# Altium PCB PCB_all_try.PcbDoc (part 5 of 5)
Units mm, origin at the board's own origin, x right, y up, seen from the top; angles counter-clockwise.
Board outline 345 x 240 mm, 2 copper layers (Top Layer, Bottom Layer); 484 components, 419 nets, 1569 pads, 699 vias.
Unrouted connection lines stored in the file: 63.
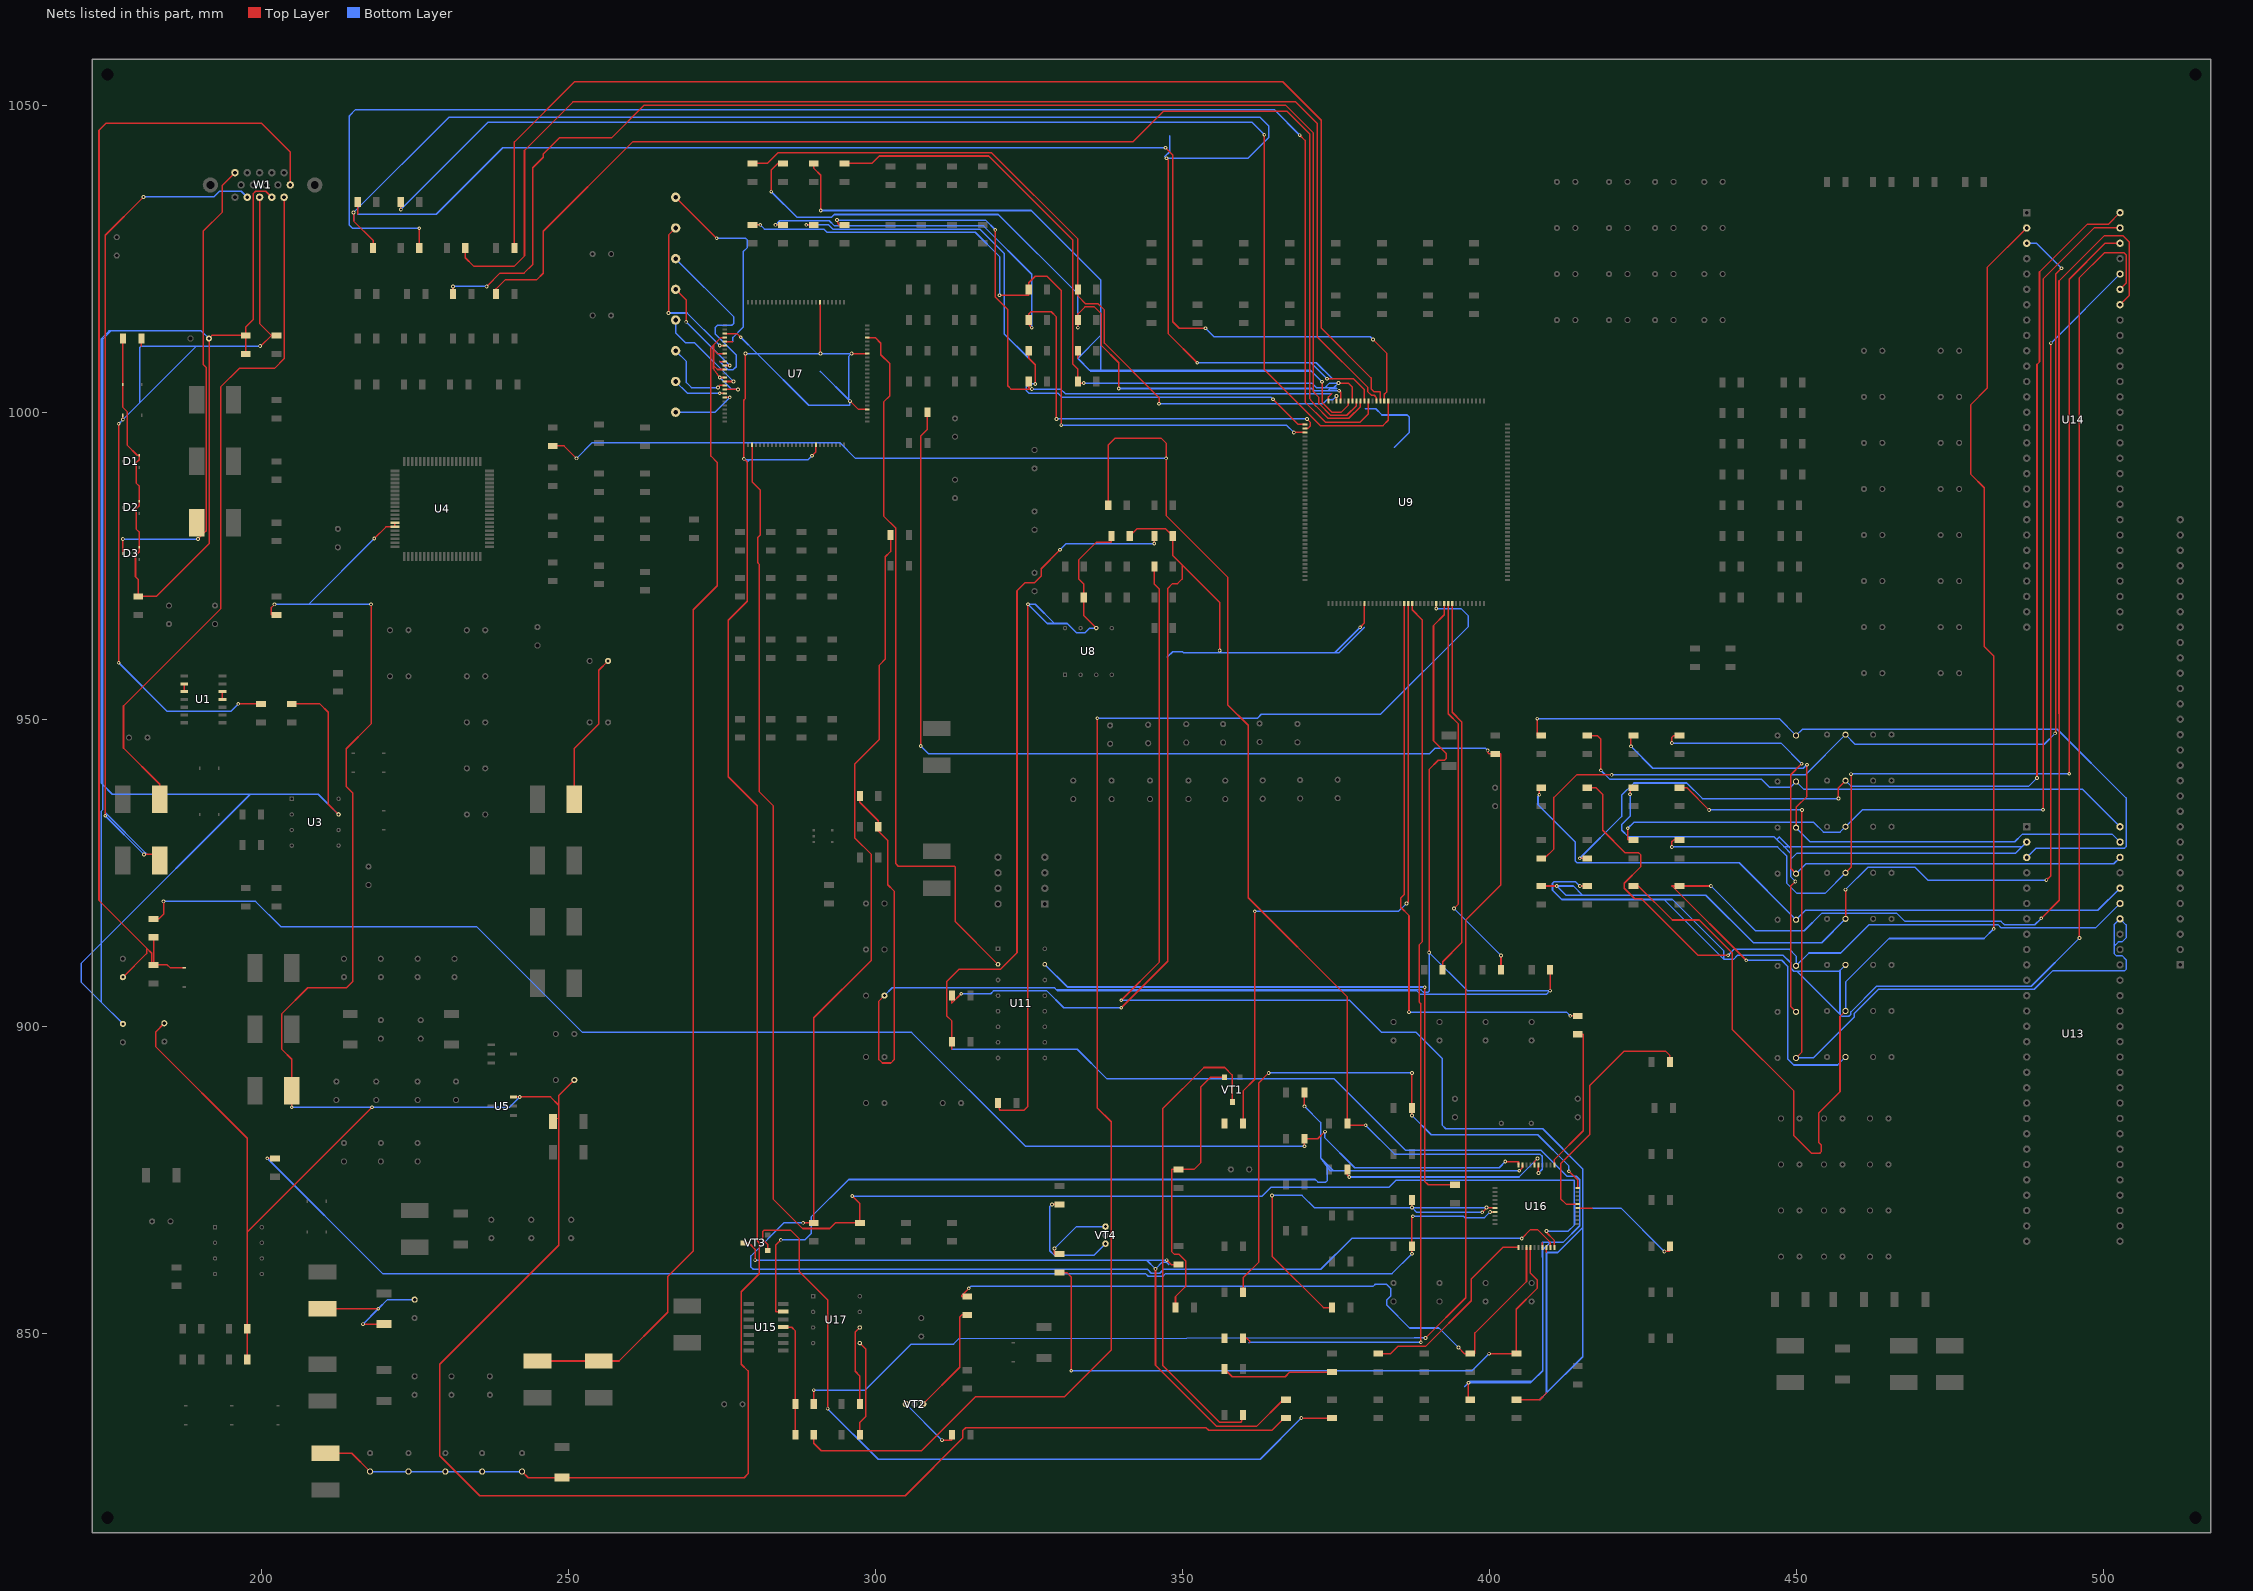
[diagram p5: the nets of this part, all layers, seen from the top]

## Via types
v1: diameter 0.6, hole 0.3, Top Layer to Bottom Layer, 699 vias

## Nets (pads, with @x,y where several pads share a name; then routed paths per layer and width w, separated by ;. In a path a pad name is that pad's centre, name@x,y a point inside that pad or via, vN(x,y) a via of type N, cw(c..) or ccw(c..) an arc to the next point about the centre after c; other vN are vias at no path point) (continued)
NetR186_2: R186.2 R200.2 U16.16 | length 74.6
  Top Layer w0.25: v1(364.617,872.465) 364.617,862.559 372.976,854.2 R186.2@374.4,854.2 ; v1(387.4,870.483) R200.2@387.4,871.7 ; v1(398.856,869.699) v1@399.59,870.433 ; v1(399.539,870.483) v1@399.59,870.433 ; v1@399.59,870.433 U16.16@400.754,870.433 ; U16.16@400.754,870.433 400.787,870.433 U16.16@400.95,870.4 U16.16@400.754,870.433
  Bottom Layer w0.25: v1(364.617,872.465) 369.494,872.465 371.475,870.483 v1(387.4,870.483) ; v1(398.856,869.699) 388.185,869.699 v1(387.4,870.483) ; v1(399.539,870.483) v1(387.4,870.483)
NetR188_1: R188.1 U15.13 U16.9 | length 160
  Top Layer w0.25: v1(284.632,865.226) 283.82,864.413 283.82,853.54 U15.13@285,853.54 ; v1(369.9,886.968) R188.1@369.9,889.2 ; v1(404.876,876.478) 405.4,877.002 U16.9@405.4,877.45
  Bottom Layer w0.25: v1(284.632,865.226) 288.544,865.226 289.56,866.242 289.56,868.934 295.681,875.055 371.666,875.055 372.091,874.63 373.38,874.63 373.634,874.884 373.634,877.088 ; v1(369.9,886.968) 372.52,884.348 372.52,878.585 ; v1(404.876,876.478) 374.628,876.478 ; 372.52,878.585 373.634,877.472 ; 372.52,878.585 373.634,877.088 ; 373.634,877.088 373.634,877.472 ; 373.634,877.088 374.087,876.478 374.628,876.478 ; 373.634,877.472 374.628,876.478
NetR189_1: R189.1 R204.2 | length 18.3
  Top Layer w0.25: R189.1@356.9,844.2 358.15,842.95 366.751,842.95 367.501,843.7 R204.2@374.4,843.7
NetR190_1: R190.1
NetR191_1: R191.1
NetR192_1: R192.1 U16.1 | length 24.1
  Top Layer w0.25: U16.1@410.6,877.45 410.6,878.307 415.29,882.997 415.29,898.7 R192.1@414.4,898.7
NetR196_1: R196.1 R197.1 U15.11 | length 19.1
  Top Layer w0.25: U15.11@285,851 286.392,851 287,850.392 R197.1@287,838.5 R196.1@287,833.5
NetR202_1: R202.1 U16.6 | length 34.5
  Top Layer w0.25: R202.1@376.9,876.7 376.9,875.752 v1(377.19,875.462) ; U16.6@407.35,877.45 407.35,877.97 v1(407.858,878.478)
  Bottom Layer w0.25: v1(377.19,875.462) 404.842,875.462 v1(407.858,878.478)
NetR207_2: R207.2 R208.1 U16.40 | length 100.9
  Top Layer w0.25: R207.2@359.9,856.7 359.9,859.053 362.483,861.637 362.483,890.829 v1(364.058,892.404) ; v1(387.4,885.469) R208.1@387.4,886.7 v1(387.4,892.404) ; v1(412.953,876.402) 414.4,874.955 U16.40@414.4,873.65
  Bottom Layer w0.25: v1(364.058,892.404) v1(387.4,892.404) ; v1(387.4,885.469) 390.524,882.345 407.866,882.345 412.953,877.258 v1(412.953,876.402)
NetR209_2: R209.2 VT1.3 | length 78.6
  Top Layer w0.25: VT1.3@358.15,887.7 358.15,888.071 358.104,892.094 356.905,893.293 353.517,893.293 346.786,886.562 346.786,844.804 356.032,835.558 359.621,835.558 R209.2@359.9,836.7
NetR214_2: R214.2 R231.1 U16.23 | length 113.4
  Top Layer w0.25: R231.1@315,856 314.08,856 314.08,856.172 v1(315.234,857.326) ; v1(394.97,847.7) 395.97,846.7 R214.2@396.9,846.7 397.662,846.7 397.662,850.062 406.05,858.449 U16.23@406.05,864
  Bottom Layer w0.25: v1(315.234,857.326) 315.615,857.707 381.127,857.707 381.432,858.012 383.261,858.012 383.946,857.326 383.946,856.082 383.286,855.421 383.286,854.608 387.02,850.875 391.795,850.875 v1(394.97,847.7)
NetR216_2: R216.2 R232.1 U16.24 | length 110.3
  Top Layer w0.25: R232.1@330,859.9 331.216,859.9 331.927,859.189 v1(331.927,843.915) ; v1(399.965,846.7) R216.2@404.393,846.7 ; R216.2@404.4,846.7 R216.2@404.393,846.7 ; U16.24@406.7,864 406.7,859.795 407.779,858.716 407.779,857.326 404.393,853.941 R216.2@404.393,846.7
  Bottom Layer w0.25: v1(331.927,843.915) 397.18,843.915 v1(399.965,846.7)
NetR218_2: R218.2 R226.1 VT1.2 | length 46.6
  Top Layer w0.25: R226.1@348.9,854.2 348.9,855.986 350.545,857.631 350.545,861.822 349.504,862.863 348.742,862.863 348.259,863.346 348.259,876.7 R218.2@349.4,876.7 351.911,876.7 353.035,877.824 353.035,890.151 354.584,891.7 VT1.2@356.9,891.7
NetR231_2: R231.2 VT2.1 | length 18
  Top Layer w0.25: VT2.1@307.8,838.5 313.773,844.473 313.773,852.678 314.095,853 R231.2@315,853
NetR232_2: R232.2 VT4.1 | length 11.5
  Top Layer w0.25: v1(329.184,863.814) 329.184,862.9 R232.2@330,862.9
  Bottom Layer w0.25: v1(329.184,863.814) 332.77,867.4 VT4.1@337.5,867.4
NetR233_2: R233.2 VT3.1 | length 128
  Top Layer w0.25: VT3.1@282.5,863.5 282.5,864.489 281.686,865.303 281.686,866.572 281.94,866.826 286.207,866.826 287.604,865.429 287.604,860.12 292.252,855.472 v1(292.252,837.743) ; v1(369.392,836.219) 369.411,836.2 R233.2@374.4,836.2
  Bottom Layer w0.25: v1(292.252,837.743) 300.482,829.513 362.687,829.513 v1(369.392,836.219)
NetR234_2: R234.2 U17.6 | length 13.1
  Top Layer w0.25: R234.2@297.5,838.5 297.5,843.077 296.748,843.829 296.748,850.208 U17.6@297.5,850.96
NetR235_2: R235.2 U17.5 | length 15.7
  Top Layer w0.25: R235.2@297.5,833.5 297.5,835.508 298.45,836.458 298.45,847.47 U17.5@297.5,848.42
NetR236_1: R236.1 R237.1 VT3.3 | length 121
  Top Layer w0.25: VT3.3@278.5,864.75 279.4,864.75 280.441,863.709 v1(280.441,861.924) ; v1(345.643,860.501) 345.643,844.804 355.6,834.847 362.093,834.847 366.446,839.2 R237.1@366.9,839.2 ; v1(347.472,861.924) 348.196,861.2 R236.1@349.4,861.2
  Bottom Layer w0.25: v1(280.441,861.924) 344.221,861.924 ; v1(347.472,861.924) 344.221,861.924 ; 347.789,861.2 347.421,861.568 346.71,861.568 v1(345.643,860.501) 344.221,861.924
NetR238_1: R238.1 VT4.3 | length 19.1
  Top Layer w0.25: v1(328.778,871) R238.1@330,871
  Bottom Layer w0.25: v1(328.778,871) 328.422,870.644 328.422,863.448 329.184,862.686 335.586,862.686 VT4.3@337.5,864.6
NetR239_1: R239.1 VT2.3 | length 10.8
  Top Layer w0.25: v1(310.888,832.612) 312.5,832.612 R239.1@312.5,833.5
  Bottom Layer w0.25: VT2.3@305,838.5 v1(310.888,832.612)
NetRX_CLK+_1: RX_CLK+.1 U7.93 | length 8.8
  Top Layer w0.25: v1(274.676,1003.071) 274.697,1003.05 U7.93@275.5,1003.05
  Bottom Layer w0.25: RX_CLK+.1@267.5,1005 269.429,1003.071 v1(274.676,1003.071)
NetRX_CLK_1: RX_CLK.1 U7.94 | length 10.7
  Top Layer w0.25: U7.94@275.5,1002.4 276.316,1002.4 v1(276.327,1002.411)
  Bottom Layer w0.25: RX_CLK.1@267.5,1000 273.916,1000 v1(276.327,1002.411)
NetRX_D0+_1: RX_D0+.1 U7.90 | length 16.2
  Top Layer w0.25: U7.90@275.5,1005 v1(276.911,1005)
  Bottom Layer w0.25: RX_D0+.1@267.5,1015 267.5,1012.952 269.127,1011.325 270.586,1011.325 v1(276.911,1005)
NetRX_D0-_1: RX_D0-.1 U7.91 | length 12.6
  Top Layer w0.25: v1(274.388,1004.011) 274.726,1004.35 U7.91@275.5,1004.35
  Bottom Layer w0.25: RX_D0-.1@267.5,1010 269.265,1008.235 269.265,1004.824 270.078,1004.011 v1(274.388,1004.011)
NetRX_D1+_1: RX_D1+.1 U7.85 | length 29.8
  Top Layer w0.25: 274.679,1008.25 U7.85@275.5,1008.25
  Bottom Layer w0.25: RX_D1+.1@267.5,1025 276.987,1015.513 276.987,1014.476 276.657,1014.146 274.32,1014.146 273.99,1013.816 273.99,1012.673 277.368,1009.294 277.368,1007.415 276.86,1006.907 276.022,1006.907 274.676,1008.253
NetRX_D1-_1: RX_D1-.1 U7.86 | length 16.9
  Top Layer w0.25: RX_D1-.1@267.5,1020 269.215,1018.285 v1(269.215,1014.705) ; U7.86@275.5,1007.6 276.319,1007.6 v1(276.327,1007.593)
  Bottom Layer w0.25: v1(269.215,1014.705) v1(276.327,1007.593)
NetRX_D2+_1: RX_D2+.1 U7.80 | length 33.4
  Top Layer w0.25: RX_D2+.1@267.5,1035 v1(274.174,1028.326) ; U7.80@275.5,1011.5 276.83,1011.5
  Bottom Layer w0.25: v1(274.174,1028.326) 278.892,1028.326 279.19,1028.028 279.19,1026.821 278.486,1026.117 278.486,1013.834 276.835,1012.183 276.835,1011.504 276.83,1011.5
NetRX_D2-_1: RX_D2-.1 U7.81 | length 25.7
  Top Layer w0.25: v1(266.344,1016.152) 266.344,1028.844 RX_D2-.1@267.5,1030 ; v1(274.676,1010.85) U7.81@275.5,1010.85
  Bottom Layer w0.25: v1(266.344,1016.152) 269.373,1016.152 v1(274.676,1010.85)
NetU1_2: U1.2 U1.3 | length 1.3
  Top Layer w0.25: U1.3@187.5,954.5 U1.2@187.5,955.77
NetU1_11: U1.11 U1.12 | length 1.3
  Top Layer w0.25: U1.11@193.7,953.23 U1.12@193.7,954.5
O3_3V: C43.1 C46.2 C48.2 C51.2 C53.2 C54.2 L14.2 U7.18 U7.29 U7.43 U7.57 U7.78 | length 345
  Top Layer w0.25: L14.2@210.5,830.5 214.75,830.5 C54.2@217.75,827.5 ; C46.2@242.5,827.5 243.5,826.5 C43.1@249,826.5 278.673,826.5 279.298,827.126 279.298,843.89 278.206,844.982 278.206,856.793 281.127,859.714 281.127,864.743 280.797,865.073 280.797,935.914 276.073,940.638 276.073,966.14 279.146,969.213 279.146,991.87 v1(278.613,992.403) 278.613,1001.954 278.867,1002.208 v1(278.867,1009.55) ; U7.78@275.5,1012.8 277.501,1012.8 v1(278.111,1012.19) ; v1(289.718,992.914) 290.35,993.546 U7.18@290.35,994.7 ; U7.57@291,1017.9 291,1017.473 291.084,1017.389 v1(291.084,1009.55) ; v1(295.91,1001.801) 297.261,1000.45 U7.29@298.7,1000.45 ; v1(296.164,1009.55) U7.43@298.7,1009.55
  Bottom Layer w0.25: C54.2@217.75,827.5 C53.2@224,827.5 C51.2@230,827.5 C48.2@236,827.5 C46.2@242.5,827.5 ; v1(278.111,1012.19) 280.751,1009.55 ; v1(278.613,992.403) 278.792,992.224 279.5,992.224 ; v1(278.867,1009.55) 280.751,1009.55 ; 279.146,991.87 279.5,992.224 ; v1(289.718,992.914) 289.028,992.224 279.5,992.224 ; 291.084,1006.627 v1@295.841,1001.87 ; v1(295.91,1001.801) v1@295.841,1001.87 ; 280.751,1009.55 v1(291.084,1009.55) v1(296.164,1009.55) 295.663,1009.049 295.663,1002.152 ; 280.751,1009.55 289.16,1001.141 295.841,1001.141 v1@295.841,1001.87 ; 295.663,1002.152 v1@295.841,1001.974 ; 295.663,1002.152 v1@295.841,1001.974 ; v1@295.841,1001.87 v1@295.841,1001.974
OSD_B: R190.2 U9.22 | length 150.8
  Top Layer w0.25: R190.2@359.9,849.2 359.9,849.224 360.502,849.224 360.959,848.766 360.959,848.563 ; U9.22@387.45,968.85 387.45,967.818 389.047,966.221 389.047,913.739 388.569,913.261 388.569,903.961 388.849,903.681 v1(388.849,848.563)
  Bottom Layer w0.25: 360.858,848.462 360.959,848.563 v1(388.849,848.563)
OSD_CLK: C131.1 R175.2 R176.2 R193.2 U9.30 | length 321.6
  Top Layer w0.25: R175.2@297.5,937.5 297.5,936.475 300.5,933.475 R176.2@300.5,932.5 300.5,931.799 302.057,930.242 302.057,923.036 303.073,922.02 303.073,894.537 302.565,894.029 301.168,894.029 300.609,894.588 300.609,904.109 C131.1@301.5,905 ; v1(390.195,912.012) 390.195,941.832 391.693,943.331 392.709,943.331 392.989,943.61 392.989,944.423 390.906,946.506 390.906,965.259 392.65,967.003 U9.30@392.65,968.85 ; v1(409.9,905.815) R193.2@409.9,909.2
  Bottom Layer w0.25: C131.1@301.5,905 302.763,906.263 329.201,906.263 329.529,905.935 ; 329.529,905.935 329.649,905.815 388.151,905.815 388.779,905.187 409.272,905.187 v1(409.9,905.815) 396.392,905.815 v1(390.195,912.012) 390.195,905.745 389.959,905.51 389.313,905.51 388.888,905.935 329.529,905.935
OSD_G: R191.2 U9.21 | length 109.5
  Top Layer w0.25: R191.2@359.9,884.2 359.9,889.465 361.798,891.362 v1(361.798,918.718) ; v1(386.512,920.013) 386.8,920.302 U9.21@386.8,968.85
  Bottom Layer w0.25: v1(361.798,918.718) 385.216,918.718 v1(386.512,920.013)
OSD_HS: R194.2 U9.31 | length 63.8
  Top Layer w0.25: U9.31@393.3,968.85 393.3,950.893 394.975,949.218 394.975,919.938 v1(394.233,919.196) ; R194.2@401.9,909.2 v1(401.9,911.53)
  Bottom Layer w0.25: v1(394.233,919.196) v1(401.9,911.53)
OSD_R: R192.2 U9.20 | length 95.1
  Top Layer w0.25: U9.20@386.15,968.85 386.15,921.48 385.572,920.902 385.572,919.378 386.918,918.032 v1(386.918,902.31) ; v1(413.182,901.7) R192.2@414.4,901.7
  Bottom Layer w0.25: v1(386.918,902.31) 412.572,902.31 v1(413.182,901.7)
OSD_VS: R195.2 U9.32 | length 61.6
  Top Layer w0.25: R195.2@392.4,909.2 392.4,910.514 395.479,913.593 395.479,949.603 393.95,951.132 U9.32@393.95,968.85
P3_3V: C41.1 C44.2 L15.2 | length 22.6
  Top Layer w0.25: L15.2@210,854 v1(219.086,854) ; v1(216.586,851.5) C41.1@220,851.5
  Bottom Layer w0.25: v1(216.586,851.5) v1(219.086,854) 220.586,855.5 C44.2@225,855.5
P3V3: C16.2 C38.1 C40.1 L12.1 R22.1 R52.1 R53.1 R237.2 U4.34 U4.35 U5.3 | length 486.2
  Top Layer w0.25: C16.2@184.25,900.5 182.88,899.13 182.88,896.641 197.75,881.771 197.75,866.51 ; R53.1@197.75,845.75 R52.1@197.75,850.75 197.75,866.51 ; v1(202.184,968.705) 201.676,968.197 201.676,967 R22.1@202.5,967 ; v1(205,886.823) L12.1@205,889.5 205,894.642 203.403,896.239 203.403,902.081 207.594,906.272 213.893,906.272 214.909,907.288 214.909,937.994 213.872,939.032 213.872,945.214 217.907,949.249 v1(217.907,968.705) ; v1(218.063,886.823) 197.75,866.51 ; v1(218.44,979.424) 220.341,981.325 U4.35@221.778,981.325 U4.34@221.778,981.975 ; U5.3@241.1,888.5 v1(242.127,888.5) 247.136,888.5 248.488,887.148 ; C40.1@247.5,884.5 247.5,885.19 247.666,885.147 248.488,884.936 ; C38.1@251,891.25 248.488,888.738 248.488,887.148 ; R237.2@366.9,836.2 366.598,836.2 364.61,834.212 354.305,834.212 353.873,834.644 314.731,834.644 314.223,834.136 314.223,832.917 304.876,823.57 235.61,823.57 229.108,830.072 229.108,844.956 248.488,864.337 248.488,884.936 ; 248.488,884.936 248.488,887.148
  Bottom Layer w0.25: v1(202.184,968.705) 207.721,968.705 ; v1(205,886.823) v1(218.063,886.823) 240.45,886.823 v1(242.127,888.5) ; v1(217.907,968.705) 207.721,968.705 ; v1(218.44,979.424) 207.721,968.705
PD: R228.2 U7.2 U16.30 | length 280.1
  Top Layer w0.25: U7.2@279.95,994.7 279.95,988.67 281.28,987.34 281.28,980.008 280.867,979.596 280.867,975.487 281.083,975.271 281.083,938.218 283.362,935.939 283.362,871.888 288.17,867.08 292.608,867.08 293.528,868 R228.2@297.5,868 297.51,868 297.51,871.118 v1(296.266,872.363) ; v1(409.312,866.664) 409.194,866.546 410.6,865.14 U16.30@410.6,864
  Bottom Layer w0.25: v1(296.266,872.363) 363.007,872.363 364.429,873.785 383.642,873.785 384.759,874.903 413.842,874.903 413.868,867.664 412.868,866.664 v1(409.312,866.664)
PDO: R57.2 R227.2 U16.29 | length 268.9
  Top Layer w0.25: v1(288.265,868) R227.2@290,868 290,901.378 299.39,910.768 299.39,927.964 296.672,930.681 296.672,942.721 300.685,946.734 300.685,958.825 301.65,959.79 301.65,976.452 302.5,977.302 R57.2@302.5,980 ; v1(405.268,865.454) 406.715,866.902 407.832,866.902 409.95,864.784 U16.29@409.95,864
  Bottom Layer w0.25: v1(288.265,868) 285.146,868 279.756,862.609 279.756,860.806 280.137,860.425 344.344,860.425 344.962,859.808 346.32,859.808 346.937,860.425 372.567,860.425 377.596,865.454 v1(405.268,865.454)
PKA_GND: L16.2 L17.2 U7.79 U7.83 U7.87 U7.89 U7.92 | length 204.9
  Top Layer w0.25: L16.2@245,845.5 L17.2@255,845.5 258.293,845.5 266.217,853.425 266.217,859.257 270.383,863.422 270.383,967.842 274.295,971.753 274.295,991.819 273.253,992.861 273.253,1010.512 273.667,1010.926 ; v1(274.676,1005.662) v1@274.676,1005.65 ; U7.92@275.5,1003.7 v1(277.673,1003.7) ; U7.89@275.5,1005.65 v1@274.676,1005.65 ; U7.87@275.5,1006.95 274.32,1006.95 273.667,1007.603 ; U7.83@275.5,1009.55 274.32,1009.55 273.667,1010.203 ; U7.79@275.5,1012.15 274.891,1012.15 273.667,1010.926 ; 273.667,1007.603 273.667,1010.203 ; 273.667,1007.603 273.667,1007.065 274.67,1005.658 v1@274.676,1005.65 ; 273.667,1010.203 273.667,1010.926
  Bottom Layer w0.25: v1(274.676,1005.662) 276.638,1003.7 v1(277.673,1003.7)
POWER_ON_OFF: R211.2 U16.21 | length 32.1
  Top Layer w0.25: R211.2@381.9,846.7 383.887,846.7 385.071,847.884 389.617,847.884 397.053,855.32 397.053,858.85 402.203,864 U16.21@404.75,864
PSC0: R220.2 U16.35 | length 23.5
  Top Layer w0.25: U16.35@414.4,870.4 416.731,870.4 ; v1(428.498,863.346) 429.4,863.346 R220.2@429.4,864.2
  Bottom Layer w0.25: 416.731,870.4 421.444,870.4 ; 416.738,870.407 421.437,870.407 421.444,870.4 ; v1(428.498,863.346) 421.444,870.4
PSC1: R210.2 U16.36 | length 40.2
  Top Layer w0.25: U16.36@414.4,871.05 412.496,871.05 411.644,871.902 411.644,877.683 416.382,882.421 416.382,890.397 421.894,895.909 428.752,895.909 429.4,895.261 R210.2@429.4,894.2
R_IN: D3.3 L6.1 W1.1 | length 80
  Top Layer w0.25: D3.3@177.5,977 v1(177.5,979.348) ; L6.1@189.5,982 189.5,980.415 190.805,980.415 ; v1(189.738,979.348) 190.805,980.415 ; W1.1@195.75,1039 193.7,1036.95 193.7,1032.612 190.602,1029.513 190.602,1007.77 191.084,1007.288 191.084,980.694 190.805,980.415
  Bottom Layer w0.25: v1(177.5,979.348) v1(189.738,979.348)
R_INA0: R48.2 U9.105 | length 214.3
  Top Layer w0.25: R48.2@222.75,1034.25 222.75,1033.026 v1(222.758,1033.018) ; v1(363.372,1045.185) 363.372,1006.925 372.484,997.814 382.686,997.814 383.55,998.677 U9.105@383.55,1001.8
  Bottom Layer w0.25: v1(222.758,1033.018) 236.982,1047.242 361.315,1047.242 v1(363.372,1045.185)
R_INA1: R47.2 U9.106 | length 211.7
  Top Layer w0.25: 215.75,1032.233 R47.2@215.75,1034.25 ; v1(347.269,1043.051) 348.437,1041.883 348.437,1014.73 349.504,1013.663 v1(353.797,1013.663) ; v1(381.051,1011.834) 383.261,1009.625 383.261,1003.28 382.9,1002.919 U9.106@382.9,1001.8
  Bottom Layer w0.25: 215.748,1032.231 215.752,1032.231 ; 215.75,1032.233 215.752,1032.231 ; v1(347.269,1043.051) 239.344,1043.051 228.524,1032.231 215.752,1032.231 ; v1(353.797,1013.663) 355.168,1012.292 380.594,1012.292 v1(381.051,1011.834)
R_INA2: R46.2 U9.107 | length 205.6
  Top Layer w0.25: R46.2@241.25,1026.75 241.25,1044.016 251.029,1053.795 366.344,1053.795 372.618,1047.521 372.618,1013.718 380.749,1005.586 380.749,1003.805 381.219,1003.335 382.185,1003.335 382.25,1003.27 U9.107@382.25,1001.8
R_INA3: R45.2 U9.108 | length 212.9
  Top Layer w0.25: R45.2@233.25,1026.75 233.25,1025.144 234.596,1023.798 241.249,1023.798 242.894,1025.443 242.894,1042.625 250.788,1050.519 368.478,1050.519 371.983,1047.013 371.983,1012.265 380.238,1004.01 380.238,1003.3 380.797,1002.741 381.254,1002.741 381.6,1002.395 U9.108@381.6,1001.8
R_INA4: R44.2 U9.110 | length 261.3
  Top Layer w0.25: R44.2@225.75,1026.75 v1(225.75,1029.945) ; v1(369.138,1045.108) 369.989,1044.258 369.989,1001.668 373.302,998.355 378.936,998.355 380.3,999.719 U9.110@380.3,1001.8
  Bottom Layer w0.25: 214.401,1048.182 214.376,1048.156 ; v1(225.75,1029.945) 214.884,1029.945 214.376,1030.453 214.376,1048.156 ; v1(369.138,1045.108) 364.973,1049.274 215.392,1049.274 214.376,1048.258 214.376,1048.156 ; 379.832,1000.557 381.508,1000.557 382.524,999.541 386.639,999.541 386.944,999.236 386.944,996.696 384.505,994.258
R_INA5: R43.2 U9.111 | length 259
  Top Layer w0.25: v1(215.062,1032.51) 215.062,1031.126 218.25,1027.938 R43.2@218.25,1026.75 ; v1(347.447,1041.349) 347.751,1041.044 347.751,1012.749 v1(352.45,1008.05) ; v1(373.558,1005.434) 377.903,1005.434 379.65,1003.687 U9.111@379.65,1001.8
  Bottom Layer w0.25: 215.062,1031.138 v1(215.062,1032.51) 230.556,1048.004 362.712,1048.004 364.058,1046.658 364.058,1044.702 360.705,1041.349 v1(347.447,1041.349) ; 347.154,1041.616 347.955,1042.416 347.955,1045.007 ; v1(352.45,1008.05) 370.942,1008.05 ; v1(373.558,1005.434) 370.942,1008.05 ; 374.447,1005.434 371.831,1008.05 370.942,1008.05
R_INA6: R42.2 U9.112 | length 205.3
  Top Layer w0.25: R42.2@238.25,1019.25 238.25,1020.064 239.723,1021.537 244.856,1021.537 245.948,1022.629 245.948,1029.475 260.541,1044.067 342.011,1044.067 346.913,1048.969 367.106,1048.969 370.731,1045.345 370.731,1002.241 371.754,1000.987 373.747,998.995 377.101,998.995 379,1000.894 U9.112@379,1001.8
R_INA7: R41.2 U9.113 | length 217.7
  Top Layer w0.25: v1(231.242,1020.47) 231.25,1020.462 R41.2@231.25,1019.25 ; v1(236.728,1020.47) 238.912,1022.655 242.824,1022.655 244.221,1024.052 244.221,1039.8 245.948,1041.527 245.948,1042.035 248.564,1044.651 257.048,1044.651 262.407,1050.011 366.801,1050.011 371.348,1045.464 371.348,1003.321 372.258,1002.411 372.258,1001.397 374.14,999.515 376.801,999.515 378.35,1001.065 U9.113@378.35,1001.8
  Bottom Layer w0.25: v1(231.242,1020.47) v1(236.728,1020.47)
R_INB0: R65.2 R107.2 U9.114 | length 117.4
  Top Layer w0.25: R65.2@295,1040.5 299.455,1040.5 300.673,1041.717 318.478,1041.717 332.156,1028.04 332.156,1007.833 333,1006.989 R107.2@333,1005 333,1004.748 v1(333.959,1004.748) ; v1(375.437,1004.748) 377.016,1004.748 377.7,1004.063 U9.114@377.7,1001.8
  Bottom Layer w0.25: v1(333.959,1004.748) 371.108,1004.748 371.863,1003.993 373.221,1003.993 ; 373.221,1003.993 374.682,1003.993 v1(375.437,1004.748) 373.976,1004.748 373.221,1003.993
R_INB1: R64.2 R106.2 U9.115 | length 169.5
  Top Layer w0.25: R64.2@290,1040.5 290.017,1040.5 290.017,1039.698 291.135,1038.581 v1(291.135,1032.84) ; 333,1008.767 R106.2@333,1010 ; v1(372.762,1004.959) 372.762,1001.606 374.345,1000.023 375.92,1000.023 377.05,1001.153 U9.115@377.05,1001.8
  Bottom Layer w0.25: v1(291.135,1032.84) 325.425,1032.84 336.702,1021.563 336.702,1012.469 ; v1(372.762,1004.959) 371.036,1006.685 ; 333,1008.767 336.702,1012.469 ; 333,1008.767 332.994,1008.761 334.95,1006.805 334.962,1006.805 ; 333,1008.767 334.962,1006.805 ; 334.962,1006.805 336.938,1006.805 ; 334.962,1006.805 335.082,1006.685 337.058,1006.685 ; 336.702,1012.469 336.702,1007.041 336.938,1006.805 ; 336.938,1006.805 337.058,1006.685 ; 336.938,1006.805 370.916,1006.805 371.036,1006.685 ; 337.058,1006.685 371.036,1006.685
R_INB2: R63.2 R105.2 U9.117 | length 128.3
  Top Layer w0.25: v1(283.083,1035.914) 283.083,1039.44 284.143,1040.5 R63.2@285,1040.5 ; v1(333,1013.773) R105.2@333,1015 333,1016 334.143,1017.143 335.686,1017.143 336.829,1016 336.829,1010.857 339.649,1008.038 v1(339.649,1003.859) ; v1(375.545,1003.489) 375.793,1003.241 375.793,1002.073 U9.117@375.75,1001.8
  Bottom Layer w0.25: v1(283.083,1035.914) 287.249,1031.748 292.876,1031.748 293.319,1032.191 320.04,1032.191 333,1019.231 v1(333,1013.773) ; v1(339.649,1003.859) 371.118,1003.859 371.488,1003.489 373.721,1003.489 ; 375.175,1003.859 374.091,1003.859 373.721,1003.489 ; v1(375.545,1003.489) 373.721,1003.489
R_INB3: R61.2 R104.2 U9.118 | length 123.3
  Top Layer w0.25: R61.2@280,1040.5 282.423,1040.5 284.186,1042.264 318.948,1042.264 333,1028.211 R104.2@333,1020 333,1018.94 334.264,1017.676 336.296,1017.676 337.333,1016.639 337.333,1011.253 346.217,1002.369 v1(346.217,1001.37) ; U9.118@375.1,1001.8 375.1,1002.625 v1(375.107,1002.632)
  Bottom Layer w0.25: v1(346.217,1001.37) 372.923,1001.37 373.601,1002.047 374.522,1002.047 v1(375.107,1002.632)
R_INB4: R60.2 R103.2 U9.120 | length 110.5
  Top Layer w0.25: v1(293.776,1031.291) 294.059,1030.5 R60.2@295,1030.5 ; v1(319.557,1029.691) 319.557,1018.74 321.564,1016.733 321.564,1004.316 322.107,1003.773 v1@325.289,1003.773 ; R103.2@325,1005 325,1004.062 v1@325.289,1003.773 ; v1(325.508,1003.773) v1@325.289,1003.773 ; U9.120@373.8,1001.8 373.8,1002.487 374.297,1002.984
  Bottom Layer w0.25: v1(293.776,1031.291) 317.957,1031.291 v1(319.557,1029.691) ; v1(325.508,1003.773) 330.18,1003.773 330.969,1002.984 374.297,1002.984 374.308,1002.995
R_INB5: R58.2 R102.2 U9.121 | length 115.5
  Top Layer w0.25: v1(288.773,1030.503) 288.776,1030.5 R58.2@290,1030.5 ; R102.2@325,1010 325,1008.775 326.06,1007.715 v1(326.06,1004.595) ; v1(364.785,1002.106) 368.891,998 U9.121@370,998
  Bottom Layer w0.25: v1(288.773,1030.503) 292.412,1030.503 293.094,1029.821 317.039,1029.821 320.98,1025.881 320.98,1012.795 ; 324.993,1008.768 320.98,1012.781 320.98,1012.795 ; 325,1008.775 320.98,1012.795 ; v1(326.06,1004.595) 325.12,1004.595 324.612,1004.087 324.612,1003.529 325.047,1003.094 329.769,1003.094 330.46,1002.403 364.488,1002.403 v1(364.785,1002.106)
R_INB6: R55.2 R101.2 U9.122 | length 122.8
  Top Layer w0.25: v1(283.769,1030.5) R55.2@285,1030.5 ; v1(325.501,1013.765) 325,1014.266 R101.2@325,1015 325,1016 325.356,1016.356 328.676,1016.356 329.514,1015.517 v1(329.514,998.906) ; U9.122@370,997.35 370.453,997.35 370.815,997.712 370.815,998.398 v1(370.307,998.906)
  Bottom Layer w0.25: v1(283.769,1030.5) 284.458,1031.189 292.513,1031.189 293.373,1030.329 317.649,1030.329 325.501,1022.477 v1(325.501,1013.765) ; v1(329.514,998.906) v1(370.307,998.906)
R_INB7: R54.2 R100.2 U9.123 | length 124.3
  Top Layer w0.25: R54.2@280,1030.5 v1(281.28,1030.5) ; v1(320.243,1019.048) 325,1019.048 R100.2@325,1020 325,1021.08 326.058,1022.138 327.987,1022.138 330.302,1019.824 v1(330.302,997.89) ; v1(368.173,996.696) 368.177,996.7 U9.123@370,996.7
  Bottom Layer w0.25: v1(281.28,1030.5) 281.962,1029.818 291.632,1029.818 292.133,1029.317 316.275,1029.317 320.243,1025.348 v1(320.243,1019.048) ; v1(330.302,997.89) 366.979,997.89 v1(368.173,996.696)
RA0: C127.2 R168.1 U14.50 | length 246
  Top Layer w0.25: v1(436.075,922.85) R168.1@430.95,922.85 429.725,922.85 v1(441.833,910.742) ; v1(489.864,917.575) 492.804,920.515 492.804,950.842 492.76,950.886 492.76,1021.359 500.151,1028.751 503.123,1028.751 504.183,1027.691 504.183,1018.983 U14.50@502.7,1017.5
  Bottom Layer w0.25: v1(436.075,922.85) 443.357,915.568 451.291,915.568 454.101,918.379 466.369,918.379 467.673,917.076 483.319,917.076 483.874,916.521 488.81,916.521 v1(489.864,917.575) ; v1(441.833,910.742) 447.624,910.742 448.567,909.8 448.567,894.712 449.58,893.699 456.699,893.699 C127.2@458,895
RA1: C125.2 R167.1 U14.2 | length 237.1
  Top Layer w0.25: R167.1@423.45,922.85 424.264,922.85 429.804,917.31 434.198,917.31 439.57,911.938 439.57,899.492 449.605,889.457 449.605,882.193 452.476,879.323 453.79,879.323 454.069,879.602 454.069,880.643 453.621,881.091 453.621,885.876 457.098,889.353 457.098,901.598 C125.2@458,902.5 ; v1(482.143,915.873) 482.143,960.298 480.593,961.847 480.593,987.686 478.416,989.863 478.416,1001.249 481.051,1003.884 481.051,1023.551 U14.2@487.5,1030
  Bottom Layer w0.25: C125.2@458,902.5 458,907.199 465.099,914.298 480.568,914.298 v1(482.143,915.873)
RA2: C123.2 R166.1 U14.51 | length 261.1
  Top Layer w0.25: v1(414.739,922.85) R166.1@415.95,922.85 ; v1(496.087,914.375) 496.087,1021.915 500.151,1025.979 503.352,1025.979 503.679,1025.652 503.679,1020.979 U14.51@502.7,1020
  Bottom Layer w0.25: v1(414.739,922.85) 414.045,923.544 410.54,923.544 410.286,923.29 410.286,922.172 411.81,920.648 428.46,920.648 ; C123.2@458,910 457.098,909.098 ; v1(496.087,914.375) 488.234,906.521 463.062,906.521 458.876,902.335 458.876,901.954 458.543,901.621 457.431,901.621 457.098,901.954 ; 428.46,920.648 429.819,920.648 438.207,912.26 438.207,910.902 ; 428.46,920.648 438.207,910.902 ; 438.207,910.902 439.744,910.902 440.423,911.581 447.826,911.581 449.071,910.336 449.071,909.48 449.58,908.971 450.081,908.971 ; 450.081,908.971 457.098,901.954 ; 450.081,908.971 456.971,908.971 457.098,909.098 ; 457.098,901.954 457.098,909.098
RA3: C121.2 R165.1 U14.52 | length 203.3
  Top Layer w0.25: R165.1@408.45,922.85 v1(410.972,922.85) ; C121.2@458,917.5 v1(458,922.261) ; v1(490.703,923.798) 491.439,924.535 v1(491.439,1011.239)
  Bottom Layer w0.25: C121.2@458,917.5 454.113,913.613 443.001,913.613 435.254,921.36 415.176,921.36 ; v1(458,922.261) 461.62,925.881 469.341,925.881 471.424,923.798 v1(490.703,923.798) ; v1(491.439,1011.239) U14.52@502.7,1022.5 ; 415.176,921.36 412.462,921.36 v1(410.972,922.85) 413.685,922.85 415.176,921.36
RA4: C119.2 R164.1 U14.54 | length 180.8
  Top Layer w0.25: v1(429.717,929.208) 429.717,930.045 430.022,930.35 R164.1@430.95,930.35 ; C119.2@458,925 458.902,925.902 v1(458.902,941.07) ; v1(494.436,941.118) 494.436,1021.664 500.272,1027.5 U14.54@502.7,1027.5
  Bottom Layer w0.25: v1(429.717,929.208) 446.938,929.208 448.462,927.684 448.462,923.265 450.088,921.639 454.639,921.639 C119.2@458,925 ; v1(458.902,941.07) 458.95,941.118 v1(494.436,941.118)
RA5: C116.2 R163.1 U14.55 | length 175.5
  Top Layer w0.25: v1(422.53,932.241) 422.53,930.35 R163.1@423.45,930.35 ; v1(490.169,935.253) 490.169,1021.69 498.48,1030 U14.55@502.7,1030
  Bottom Layer w0.25: v1(422.53,932.241) 423.536,933.247 452.78,933.247 454.406,931.621 457.121,931.621 C116.2@458,932.5 460.753,935.253 v1(490.169,935.253)
RA6: C113.2 R162.1 U14.56 | length 186.7
  Top Layer w0.25: v1(414.731,927.35) R162.1@415.95,927.35 ; v1(456.844,937.082) 456.844,938.844 C113.2@458,940 ; v1(489.179,940.435) 489.179,1007.77 489.585,1008.177 489.585,1022.833 497.332,1030.58 500.78,1030.58 U14.56@502.7,1032.5
  Bottom Layer w0.25: v1(414.731,927.35) 421.538,934.157 421.538,937.616 423.545,939.622 432.156,939.622 434.696,937.082 v1(456.844,937.082) ; C113.2@458,940 458.886,939.114 487.858,939.114 v1(489.179,940.435)
RA7: C110.2 R161.1 U14.3 | length 181.8
  Top Layer w0.25: R161.1@408.45,927.35 408.987,927.35 410.515,928.878 410.515,937.26 414.198,940.943 v1(419.913,940.943) ; v1(492.125,947.699) 492.252,947.826 492.252,1022.528 v1(493.166,1023.442)
  Bottom Layer w0.25: v1(419.913,940.943) 451.443,940.943 C110.2@458,947.5 459.553,945.947 490.372,945.947 v1(492.125,947.699) ; U14.3@487.5,1027.5 489.109,1027.5 v1(493.166,1023.442)
RB0: C107.2 R160.1 U13.50 | length 138.3
  Top Layer w0.25: R160.1@430.95,938.85 432.166,938.85 v1(435.788,935.228) ; C107.2@449.95,894.85 450.901,895.801 v1(450.901,935.228)
  Bottom Layer w0.25: v1(435.788,935.228) v1(450.901,935.228) ; C107.2@449.95,894.85 452.756,894.85 459.383,901.477 459.383,902.029 463.371,906.017 488.72,906.017 491.719,909.015 503.428,909.015 503.682,909.269 503.682,910.844 503.005,911.521 502.06,911.521 501.721,911.86 501.721,913.023 ; 501.721,913.023 501.721,916.521 U13.50@502.7,917.5 503.682,916.518 503.682,914.4 503.022,913.74 502.437,913.74 501.721,913.023
RB1: C104.2 R159.1 U13.2 | length 146.3
  Top Layer w0.25: v1(422.91,937.793) 422.91,938.85 R159.1@423.45,938.85 ; v1(449.834,923.595) 449.071,922.832 449.071,903.229 C104.2@449.95,902.35
  Bottom Layer w0.25: v1(422.91,937.793) 422.91,934.212 421.564,932.866 421.564,931.926 422.656,930.834 446.405,930.834 446.799,930.44 ; v1(449.834,923.595) 449.047,924.382 449.047,927.176 ; U13.2@487.5,930 486.759,929.259 ; 446.799,930.44 447.98,929.259 ; 446.799,930.44 447.192,930.834 448.767,929.259 ; 447.98,929.259 449.047,928.192 ; 447.98,929.259 448.767,929.259 ; 448.767,929.259 486.759,929.259 ; 448.767,929.259 449.047,928.98 449.047,928.192 ; 449.047,927.176 449.047,928.192 ; 449.047,927.176 450.088,928.218 485.718,928.218 486.759,929.259
RB2: C101.2 R158.1 U13.51 | length 115.6
  Top Layer w0.25: R158.1@415.95,938.85 417.383,938.85 418.465,937.768 418.465,931.926 422.148,928.243 424.332,928.243 424.688,927.887 424.688,926.008 421.97,923.29 421.97,922.477 423.672,920.775 424.764,920.775 433.959,911.581 v1(438.887,911.581)
  Bottom Layer w0.25: v1(438.887,911.581) 439.877,912.571 448.818,912.571 449.95,911.439 C101.2@449.95,909.85 452.036,911.936 457.225,911.936 461.861,916.572 482.815,916.572 483.37,916.017 498.717,916.017 U13.51@502.7,920
RB3: C97.2 R157.1 U13.52 | length 109.7
  Top Layer w0.25: v1(408.153,937.717) 408.153,938.85 R157.1@408.45,938.85
  Bottom Layer w0.25: v1(408.153,937.717) 407.924,937.489 407.924,936.066 414.02,929.97 414.02,926.871 414.274,926.617 440.683,926.617 C97.2@449.95,917.35 451.483,918.883 499.083,918.883 U13.52@502.7,922.5
RB4: C93.2 R156.1 U13.54 | length 97.7
  Top Layer w0.25: v1(429.717,946.125) 429.717,947.045 430.022,947.35 R156.1@430.95,947.35 ; C93.2@449.95,924.85 449.071,925.729 449.071,940.967 v1(450.85,942.746)
  Bottom Layer w0.25: v1(429.717,946.125) 447.472,946.125 v1(450.85,942.746) ; C93.2@449.95,924.85 451.583,926.483 501.683,926.483 U13.54@502.7,927.5
RB5: C88.2 R155.1 U13.55 | length 98.2
  Top Layer w0.25: v1(423.062,945.591) 423.062,947.35 R155.1@423.45,947.35 ; C88.2@449.95,932.35 449.95,935.674 451.714,937.438 v1(451.714,942.594)
  Bottom Layer w0.25: v1(423.062,945.591) 426.618,942.035 451.104,942.035 451.663,942.594 v1(451.714,942.594) ; C88.2@449.95,932.35 452.228,930.072 485.572,930.072 486.74,931.24 501.46,931.24 U13.55@502.7,930
RB6: C84.2 R154.1 U13.56 | length 96.6
  Top Layer w0.25: R154.1@415.95,947.35 417.576,947.35 418.16,946.766 v1(418.16,941.68)
  Bottom Layer w0.25: v1(418.16,941.68) 419.583,940.257 444.271,940.257 445.567,938.962 449.062,938.962 C84.2@449.95,939.85 451.219,938.581 496.619,938.581 U13.56@502.7,932.5
RB7: C80.2 R153.1 U13.3 | length 130.3
  Top Layer w0.25: v1(407.804,950.102) 407.804,947.35 R153.1@408.45,947.35
  Bottom Layer w0.25: v1(407.804,950.102) 447.198,950.102 C80.2@449.95,947.35 450.985,948.385 492.481,948.385 503.682,937.184 503.682,929.259 503.428,929.005 489.005,929.005 U13.3@487.5,927.5
ROM_SCL: R112.2 R171.1 R223.2 U16.27 | length 290.1
  Top Layer w0.25: 312.5,896.268 R171.1@312.5,897.5 312.5,900.858 311.658,901.7 311.658,907.288 313.69,909.32 320.446,909.32 323.088,911.962 323.088,970.909 324.412,972.233 325.93,972.233 327.025,973.328 327.025,974.522 v1(330.098,977.595) ; v1(345.45,978.611) R112.2@345.45,979.85 ; v1(396.596,841.959) 396.596,839.2 R223.2@396.9,839.2 ; U16.27@408.65,864 408.65,864.779
  Bottom Layer w0.25: 312.5,896.268 312.496,896.264 332.892,896.264 337.668,891.489 374.675,891.489 386.359,879.805 408.432,879.805 412.648,875.589 414.147,875.589 414.706,875.03 414.706,867.537 411.988,864.819 409.905,864.819 ; v1(330.098,977.595) 331.114,978.611 v1(345.45,978.611) ; 395.986,841.35 v1(396.596,841.959) ; 408.65,864.779 408.686,864.743 408.686,863.6 ; v1(396.596,841.959) 396.875,842.239 406.993,842.239 ; v1(396.596,841.959) 406.714,841.959 406.993,842.239 ; 406.993,842.239 408.686,843.932 408.686,862.406 ; 408.686,862.406 408.686,863.6 ; 408.686,862.406 408.61,862.482 408.61,864.819 409.905,864.819 ; 408.686,863.6 409.905,864.819
ROM_SCL_ASIC: R112.1 R116.1 R172.1 U9.10 | length 182
  Top Layer w0.25: R172.1@312.5,905 312.5,903.787 v1(314.02,905.307) ; v1(340.055,903.021) 347.624,910.59 347.624,971.296 348.412,972.083 349.225,972.083 349.961,972.82 349.961,975.17 ; R116.1@341.45,979.85 342.599,980.999 347.301,980.999 R112.1@348.45,979.85 348.45,976.681 349.961,975.17 ; v1(356.083,961.187) 356.083,969.048 349.961,975.17 ; v1(378.968,964.971) 379.65,965.653 U9.10@379.65,968.85
  Bottom Layer w0.25: v1(314.02,905.307) 318.8,905.307 319.253,905.759 327.97,905.759 330.708,903.021 v1(340.055,903.021) ; 347.548,960.12 348.437,961.009 350.037,961.009 350.215,960.831 356.438,960.831 ; v1(356.083,961.187) 356.438,960.831 ; v1(378.968,964.971) 374.828,960.831 ; 379.654,964.971 375.514,960.831 374.828,960.831 ; 356.438,960.831 374.828,960.831
ROM_SCL_EEPROM: R110.2 R116.2 R174.2 U8.6 | length 126.6
  Top Layer w0.25: R174.2@320,887.5 320.294,886.308 324.206,886.308 324.866,886.968 v1(324.866,968.731) ; U8.6@335.99,964.85 333.95,966.89 R110.2@333.95,969.85 333.95,972.033 333.121,972.862 333.121,975.944 336.032,978.855 338.45,978.855 R116.2@338.45,979.85
  Bottom Layer w0.25: U8.6@335.99,964.85 334.927,964.85 334.188,964.111 332.737,964.111 331.259,965.589 329.184,965.589 ; 329.184,965.589 328.008,965.589 v1(324.866,968.731) 326.042,968.731 329.184,965.589
ROM_SDA: R113.2 R225.2 U16.28 | length 266.4
  Top Layer w0.25: v1(340.055,904.24) 346.278,910.463 346.278,971.179 345.45,972.007 R113.2@345.45,974.85 ; R225.2@404.4,839.2 408.203,839.2 409.3,840.297 ; 409.3,863.189 U16.28@409.3,864
  Bottom Layer w0.25: v1(340.055,904.24) 377.241,904.24 382.473,899.008 388.112,899.008 392.303,894.817 392.303,883.92 392.913,883.31 408.686,883.31 415.214,876.783 415.214,867.232 ; 408.203,839.2 409.3,840.297 ; 409.3,863.189 409.3,840.297 ; 409.3,840.297 409.321,840.318 ; 409.321,840.318 415.214,846.21 415.214,867.232 ; 409.321,840.318 409.321,863.168 411.15,863.168 415.214,867.232
SCDT: R56.2 R201.2 U16.17 | length 217.1
  Top Layer w0.25: v1(201.016,878.5) R56.2@202.25,878.5 ; v1(387.4,862.973) R201.2@387.4,864.2 387.4,868.908 v1(387.553,869.061) ; v1(400.126,869.75) U16.17@400.95,869.75
  Bottom Layer w0.25: v1(201.016,878.5) 219.776,859.739 344.022,859.739 344.458,859.303 346.824,859.303 347.26,859.739 384.166,859.739 v1(387.4,862.973) ; v1(387.553,869.061) 395.808,869.061 396.011,868.858 399.234,868.858 v1(400.126,869.75)
VCLK00: R196.2 U9.28 | length 235.8
  Top Layer w0.25: R196.2@290,833.5 290,832.104 291.219,830.885 307.518,830.885 316.281,839.648 330.784,839.648 338.43,847.293 338.43,884.453 336.169,886.714 v1(336.169,950.163) ; v1(391.35,968.019) U9.28@391.35,968.85
  Bottom Layer w0.25: v1(336.169,950.163) 362.229,950.163 362.864,950.798 382.27,950.798 396.596,965.124 396.596,966.8 395.376,968.019 v1(391.35,968.019)
VCLK01: R99.2 R169.1 R197.2 | length 356.2
  Top Layer w0.25: R197.2@290,838.5 v1(290,840.765) ; v1(307.416,945.642) 307.416,996.137 308.5,997.221 R99.2@308.5,1000 ; v1(389.609,849.252) 396.164,855.806 396.164,917.321 401.853,923.011 401.853,944.35 R169.1@400.95,944.35 399.999,944.35 399.723,944.626 v1(399.723,944.937)
  Bottom Layer w0.25: v1(290,840.765) 298.374,840.765 305.867,848.258 312.75,848.258 313.652,849.16 387.773,849.252 v1(389.609,849.252) ; v1(307.416,945.642) 308.712,944.347 390.216,944.347 391.12,945.25 399.41,945.25 v1(399.723,944.937)
VGA_CON: R8.2 R187.1 U16.10 | length 247
  Top Layer w0.25: R8.2@182.5,917.5 183.388,917.5 184.125,918.237 v1(184.125,920.344) ; v1(369.9,880.466) R187.1@369.9,881.7 372.074,881.7 v1(373.228,882.853) ; v1(402.59,877.976) 404.75,877.976 U16.10@404.75,877.45
  Bottom Layer w0.25: v1(184.125,920.344) 199.111,920.344 203.276,916.178 235.153,916.178 252.324,899.008 305.918,899.008 324.46,880.466 v1(369.9,880.466) ; v1(402.59,877.976) 401.599,876.986 378.082,876.986 373.18,881.888 v1@373.18,882.843 ; v1@373.18,882.843 373.228,882.843 v1(373.228,882.853) v1@373.18,882.843
VGA_CONN: C5.1 R1.1 R8.1 W1.10 ZD4.2 | length 194.7
  Top Layer w0.25: C5.1@177.5,908 181.356,911.856 181.356,912.749 ; R8.1@182.5,914.5 R1.1@182.5,910 ; ZD4.2@187.5,909.5 185.234,909.5 184.734,910 R1.1@182.5,910 ; W1.10@204.75,1037 204.75,1042.365 200.076,1047.039 174.752,1047.039 173.609,1045.896 173.609,920.496 181.356,912.749 ; 181.356,912.749 182.194,911.911 182.194,910 R1.1@182.5,910
VGA_HS: R2.1 R3.2 R7.1 W1.13 ZD2.2 | length 141
  Top Layer w0.25: v1(176.809,959.206) v1(176.809,998.114) ; v1(177.5,998.804) ZD2.2@177.5,999.5 ; 180.5,1010.775 R2.1@180.5,1012 ; v1(196.291,952.5) R3.2@200,952.5 ; W1.13@199.75,1035 199.75,1014.426 201.676,1012.5 ; v1(199.847,1010.768) 199.944,1010.768 201.676,1012.5 ; R7.1@202.5,1012.5 201.676,1012.5
  Bottom Layer w0.25: v1(176.809,959.206) 184.734,951.281 195.072,951.281 v1(196.291,952.5) ; v1(176.809,998.114) v1(177.5,998.804) 180.264,1001.568 ; 180.5,1010.775 180.508,1010.768 ; v1(199.847,1010.768) 189.463,1010.768 ; 180.264,1001.568 189.463,1010.768 ; 180.264,1001.568 180.264,1010.539 180.492,1010.768 180.508,1010.768 ; 180.508,1010.768 189.463,1010.768
VGA_SCL: L2.1 W1.15 | length 114.6
  Top Layer w0.25: L2.1@183.5,937 183.5,939.409 177.597,945.312 177.597,952.17 193.396,967.969 193.396,1004.087 196.44,1007.131 202.184,1007.131 203.75,1008.697 W1.15@203.75,1035
VGA_SDA: L3.1 W1.12 | length 143.1
  Top Layer w0.25: v1(174.625,934.288) 174.625,1028.827 v1(180.848,1035.05) ; v1(180.924,927.989) 183.5,927.989 L3.1@183.5,927
  Bottom Layer w0.25: v1(174.625,934.288) v1(180.924,927.989) ; 174.625,934.796 181.178,928.243 181.432,927.989 ; v1(180.848,1035.05) 192.278,1035.05 193.218,1035.99 196.76,1035.99 W1.12@197.75,1035
VGA_VS: C10.1 C13.1 D1.2 D2.2 D3.2 R2.2 R4.1 R4.2 R5.2 R6.1 U3.7 W1.14 ZD1.2 | length 446.7
  Top Layer w0.25: R2.2@177.5,1012 ZD1.2@177.5,1004.5 177.5,1000.785 178.181,1000.104 178.181,994.639 179.832,992.988 D1.2@180.15,992.988 ; D1.2@180.15,993 D1.2@180.15,992.988 ; R4.1@197.5,1009.5 R4.2@197.5,1012.5 ; W1.14@201.75,1035 200.76,1035.99 199.136,1035.99 198.755,1035.609 198.755,1015.136 197.5,1013.881 R4.2@197.5,1012.5 ; R5.2@205,952.5 209.575,952.5 210.947,951.128 210.947,936.173 U3.7@212.62,934.5 ; D1.2@180.15,992.988 180.15,992.264 179.646,991.76 179.646,988.488 180.15,987.984 D2.2@180.15,985.5 180.15,984.771 179.646,984.267 179.646,980.995 180.15,980.491 D3.2@180.15,978 180.15,977.29 179.553,976.693 179.553,973.201 180,972.754 R6.1@180,970 182.931,970 191.592,978.661 191.592,1012 C10.1@191.5,1012 192,1012.5 R4.2@197.5,1012.5
  Bottom Layer w0.25: C13.1@177.5,900.4 173.939,903.961 ; C10.1@191.5,1012 190.269,1013.231 175.539,1013.231 ; U3.7@212.62,934.5 209.327,937.793 198.247,937.793 ; 173.939,903.961 170.688,907.212 170.688,910.234 173.939,913.486 ; 173.939,903.961 173.939,913.486 ; 173.939,913.486 198.247,937.793 ; 173.939,913.486 173.939,934.999 174.244,935.304 174.244,939.317 ; 174.244,939.317 174.244,1011.936 175.539,1013.231 ; 174.244,939.317 173.939,939.622 173.939,1011.936 175.235,1013.231 175.539,1013.231 ; 174.244,939.317 175.768,937.793 198.247,937.793
VLCK00: C37.1 L8.2 | length 24.8
  Top Layer w0.25: L8.2@251,937 251,945.258 254.965,949.223 254.965,957.965 C37.1@256.5,959.5
VSYNC_D: U7.47 U11.2 | length 117.8
  Top Layer w0.25: U7.47@298.7,1012.15 299.989,1012.15 300.921,1011.218 300.921,1009.338 302.351,1007.908 302.351,1002.654 301.371,1001.674 301.371,983.082 303.327,981.126 303.327,926.49 303.759,926.059 312.928,926.059 313.03,925.957 313.03,917.05 U11.2@320,910.08
VSYNC_IN: R183.1 U11.15 | length 158.4
  Top Layer w0.25: v1(389.458,906.374) 389.458,874.784 390.042,874.2 R183.1@394.4,874.2
  Bottom Layer w0.25: U11.15@327.62,910.08 331.261,906.439 ; 331.261,906.439 331.326,906.374 v1(389.458,906.374) 389.393,906.439 331.261,906.439
VSYNC_MCU: R18.1 R109.2 R203.1 U16.5 | length 284.2
  Top Layer w0.25: R18.1@247.5,994.5 249.326,994.5 v1(251.347,992.48) ; R109.2@337.95,984.85 337.95,994.664 339.02,995.734 346.605,995.734 347.37,994.969 v1(347.37,992.48) 347.37,983.158 357.378,973.15 357.378,952.369 360.731,949.016 360.731,920.928 376.9,904.759 R203.1@376.9,884.2 376.9,883.895 v1(379.857,883.895) ; v1(408,876.122) U16.5@408,877.45
  Bottom Layer w0.25: v1(251.347,992.48) 253.927,995.06 294.221,995.06 296.801,992.48 v1(347.37,992.48) ; v1(379.857,883.895) 384.556,879.196 408.254,879.196 408.61,878.84 408.61,876.732 v1(408,876.122)
pads on no net: J1.7 J1.8 J1.9 U1.5 U1.6 U1.8 U1.9 U3.1 U3.2 U3.3 U7.40 U7.41 U7.42 U7.97 U7.99 U9.5 U9.15 U9.18 U9.24 U9.25 U9.27 U9.42 U9.132 U9.138 U10.1 U15.1 U15.2 U15.4 U15.5 U15.6 U15.8 U15.9 U15.10